# EAGLE board main (EAGLE 9.6.1)
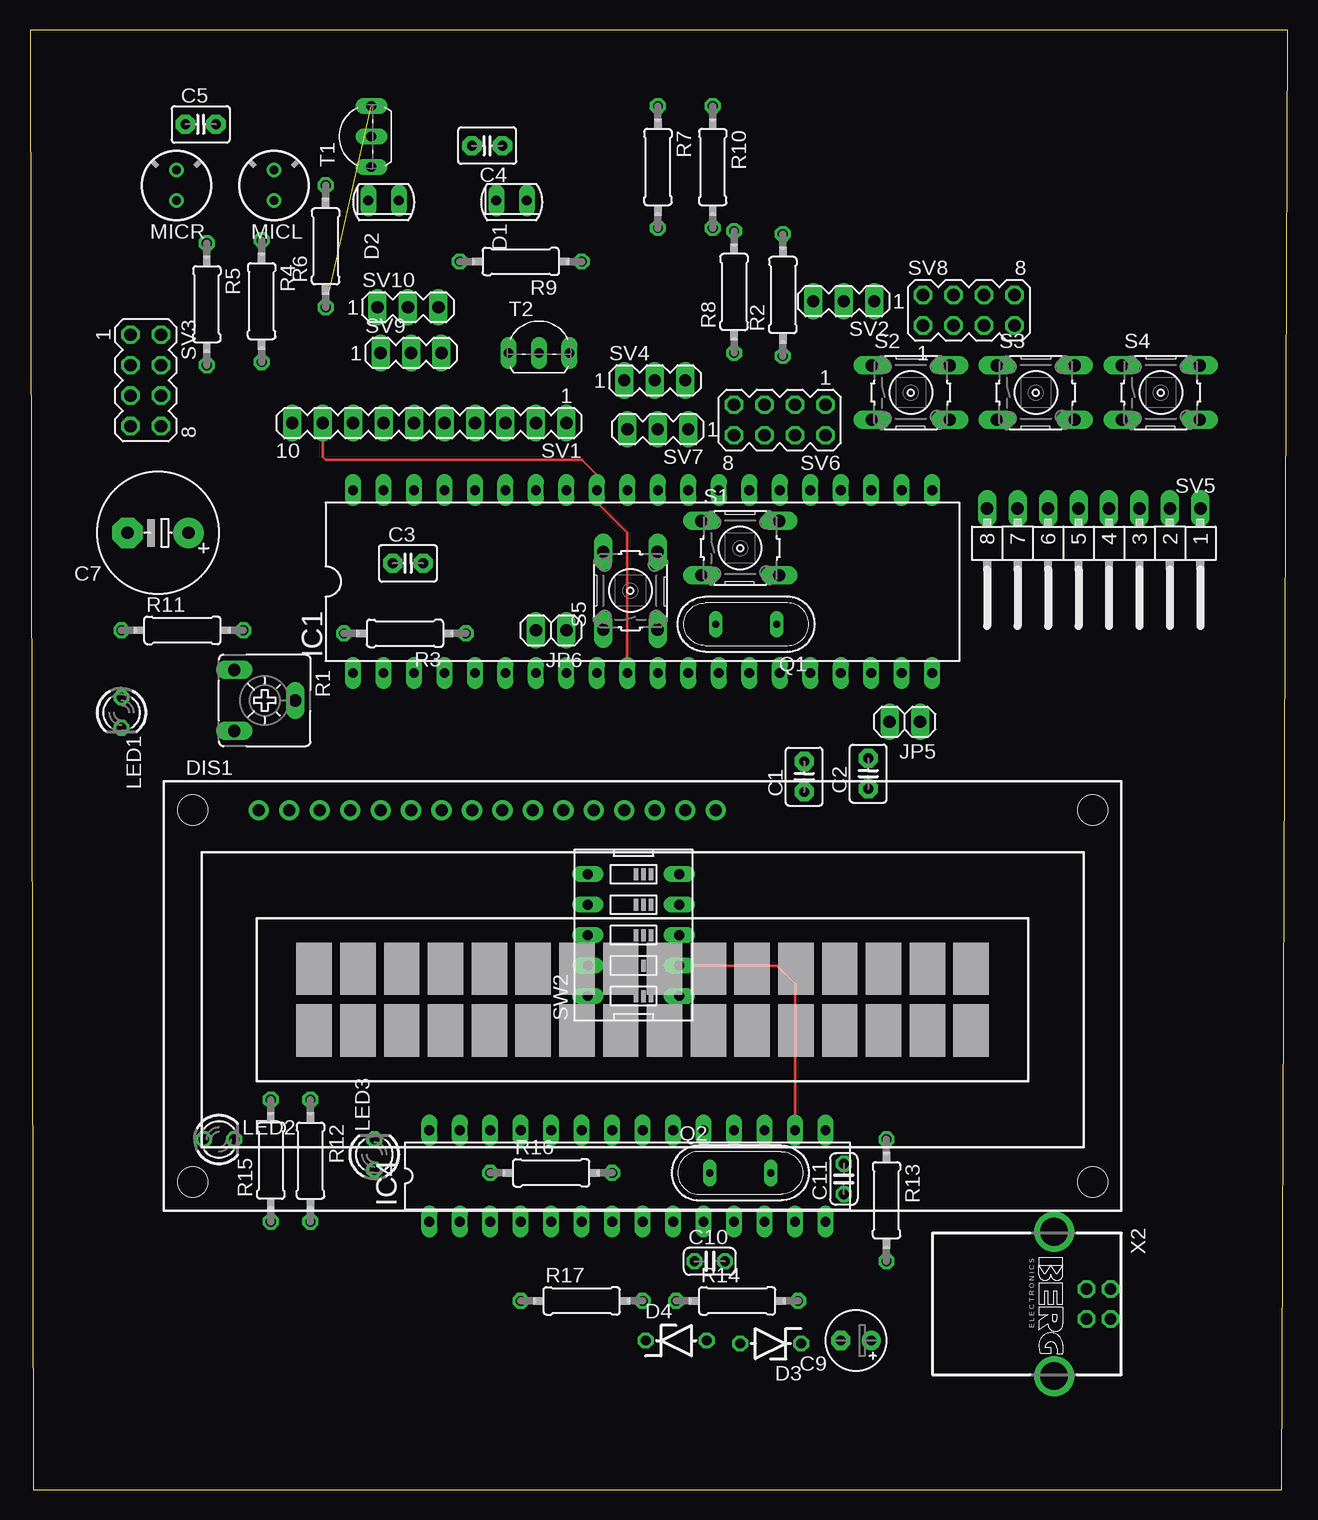
[diagram p0: board, top side]
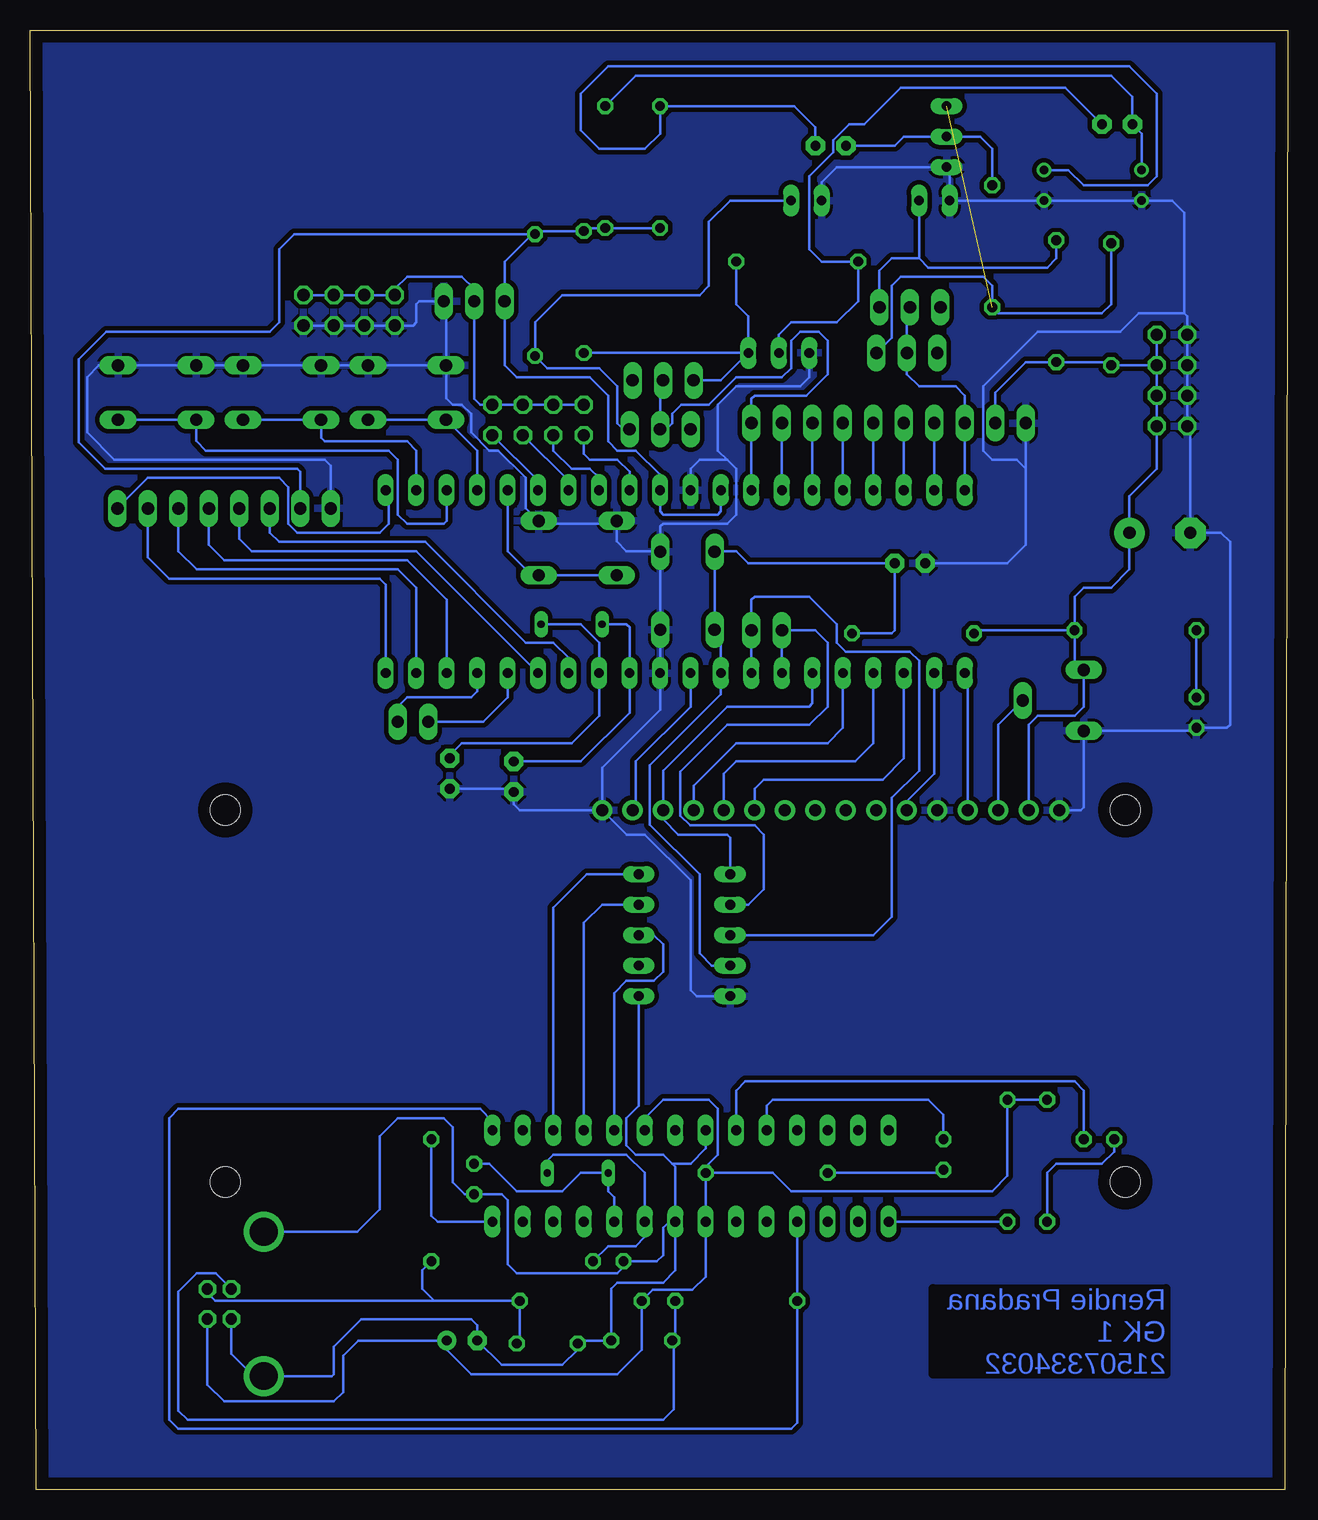
[diagram p1: board, bottom side, seen from below]

Size 104.83 x 121.66 mm. Coordinates in mm from the lower left corner, seen from the top.
Outline: 0.25,0 104.32,0 104.83,121.66 0,121.66 0.25,0
Copper layers (1*16): Top 0.035mm / dielectric 1.5mm / Bottom 0.035mm
Design rules "default *": minimum track width 6mil, minimum drill 0.35mm, track to track 15mil, track to pad 15mil, pad to pad 15mil, via to via 15mil, smd to smd 15mil, copper to edge 40mil, drill to drill 6mil, minimum pad ring 10mil, minimum via ring 8mil, stop-mask expansion 4mil, vias tented up to drill 0mil, thermal gap 10mil

## Footprints (pad centres in the part's own frame; a part is rotated, then mirrored left to right if it is on the bottom)
C2.5-3 = drill 0.813 pad 1.6 octagon: 1 -1.27,0; 2 1.27,0
E5-10,5 = drill 1.016 pad 2.54: + -2.54,0 | drill 1.016 pad 2.54 octagon: - 2.54,0
E2,5-5 = drill 0.813 pad 1.6: + -1.27,0 | drill 0.813 pad 1.6 octagon: - 1.27,0
C025-024X044 = drill 0.813 octagon: 1 -1.27,0; 2 1.27,0
SFH225 = drill 0.813 long: A 0,1.27; K 0,-1.27
ZDIO-5 = drill 0.813 octagon: A 2.54,0; C -2.54,0
TUXGR_16X2_R2 = drill 1 pad 1.676: 1 -32,15.5; 2 -29.46,15.5; 3 -26.92,15.5; 4 -24.38,15.5; 5 -21.84,15.5; 6 -19.3,15.5; 7 -16.76,15.5; 8 -14.22,15.5; 9 -11.68,15.5; 10 -9.14,15.5; 11 -6.6,15.5; 12 -4.06,15.5; 13 -1.52,15.5; 14 1.02,15.5; 15 3.56,15.5; 16 6.1,15.5 | hole 2.5: -37.5,-15.5; 37.5,-15.5; -37.5,15.5; 37.5,15.5
DIL40 = drill 0.813 long: 1 -24.13,-7.62; 2 -21.59,-7.62; 3 -19.05,-7.62; 4 -16.51,-7.62; 5 -13.97,-7.62; 6 -11.43,-7.62; 7 -8.89,-7.62; 8 -6.35,-7.62; 9 -3.81,-7.62; 10 -1.27,-7.62; 11 1.27,-7.62; 12 3.81,-7.62; 13 6.35,-7.62; 14 8.89,-7.62; 15 11.43,-7.62; 16 13.97,-7.62; 17 16.51,-7.62; 18 19.05,-7.62; 19 21.59,-7.62; 20 24.13,-7.62; 21 24.13,7.62; 22 21.59,7.62; 23 19.05,7.62; 24 16.51,7.62; 25 13.97,7.62; 26 11.43,7.62; 27 8.89,7.62; 28 6.35,7.62; 29 3.81,7.62; 30 1.27,7.62; 31 -1.27,7.62; 32 -3.81,7.62; 33 -6.35,7.62; 34 -8.89,7.62; 35 -11.43,7.62; 36 -13.97,7.62; 37 -16.51,7.62; 38 -19.05,7.62; 39 -21.59,7.62; 40 -24.13,7.62
DIL28-3 = drill 0.813 long: 1 -16.51,-3.81; 2 -13.97,-3.81; 3 -11.43,-3.81; 4 -8.89,-3.81; 5 -6.35,-3.81; 6 -3.81,-3.81; 7 -1.27,-3.81; 8 1.27,-3.81; 9 3.81,-3.81; 10 6.35,-3.81; 11 8.89,-3.81; 12 11.43,-3.81; 13 13.97,-3.81; 14 16.51,-3.81; 15 16.51,3.81; 16 13.97,3.81; 17 11.43,3.81; 18 8.89,3.81; 19 6.35,3.81; 20 3.81,3.81; 21 1.27,3.81; 22 -1.27,3.81; 23 -3.81,3.81; 24 -6.35,3.81; 25 -8.89,3.81; 26 -11.43,3.81; 27 -13.97,3.81; 28 -16.51,3.81
1X02 = drill 1.016 long: 1 -1.27,0; 2 1.27,0
LED3MM = drill 0.813 octagon: A -1.27,0; K 1.27,0
F6050AP = drill 0.7 pad 1.2: 1 0,1.27; 2 0,-1.27
QS = drill 0.61 long: 1 -2.54,0; 2 2.54,0
CA6V = drill 1.016 long: A -2.54,-2.54; E 2.54,-2.54; S 0,2.54
0207/10 = drill 0.813 octagon: 1 -5.08,0; 2 5.08,0
B3F-10XX = drill 1.016 long: 1 -3.251,2.261; 2 3.251,2.261; 3 -3.251,-2.261; 4 3.251,-2.261
MA10-1 = drill 1.016 long: 1 -11.43,0; 2 -8.89,0; 3 -6.35,0; 4 -3.81,0; 5 -1.27,0; 6 1.27,0; 7 3.81,0; 8 6.35,0; 9 8.89,0; 10 11.43,0
MA03-1 = drill 1.016 long: 1 -2.54,0; 2 0,0; 3 2.54,0
MA04-2 = drill 1.016 octagon: 1 -3.81,-1.27; 2 -3.81,1.27; 3 -1.27,-1.27; 4 -1.27,1.27; 5 1.27,-1.27; 6 1.27,1.27; 7 3.81,-1.27; 8 3.81,1.27
MA08-1W = drill 1.016 long: 1 -8.89,0; 2 -6.35,0; 3 -3.81,0; 4 -1.27,0; 5 1.27,0; 6 3.81,0; 7 6.35,0; 8 8.89,0
EDG-05 = drill 0.813 long: 1 -5.08,-3.81; 2 -2.54,-3.81; 3 0,-3.81; 4 2.54,-3.81; 5 5.08,-3.81; 6 5.08,3.81; 7 2.54,3.81; 8 0,3.81; 9 -2.54,3.81; 10 -5.08,3.81
TO92-EBC = drill 0.813 long: B 0,-1.27; C 2.54,-1.27; E -2.54,-1.27
PN61729-S = drill 0.95 octagon: 1 1.25,4.71; 2 -1.25,4.71; 3 -1.25,2.71; 4 1.25,2.71 | drill 2.3 pad 2.9: S1 -6.02,0; S2 6.02,0

## Placement (x,y rotation side)
C1  22p  [C2.5-3]  64.52,59.44 90 top
C2  22p  [C2.5-3]  69.85,59.69 90 top
C3  10nF  [C2.5-3]  31.5,77.22 0 top
C4  100nF  [C2.5-3]  38.1,112.01 180 top
C5  100nF  [C2.5-3]  14.22,113.79 0 top
C7  1000uF/16V  [E5-10,5]  10.67,79.76 180 top
C9  10uF/16V  [E2,5-5]  68.83,12.45 180 top
C10  22pF  [C025-024X044]  56.64,19.05 0 top
C11  22pF  [C025-024X044]  67.82,25.91 90 top
D1  SFH225  [SFH225]  40.13,107.44 270 top
D2  SFH225  [SFH225]  29.46,107.44 270 top
D3  DZ3,6V  [ZDIO-5]  61.72,12.19 180 top
D4  DZ3,6V  [ZDIO-5]  53.85,12.45 0 top
DIS1  TUXGR_16X2_R2  [TUXGR_16X2_R2]  51.05,41.15 0 top
IC1  MEGA16-P  [DIL40]  51.05,75.69 0 top
IC4  MEGA8-P  [DIL28-3]  49.78,26.16 0 top
JP5  [1X02]  72.9,64.01 180 top
JP6  [1X02]  43.43,71.63 180 top
LED1  merah  [LED3MM]  7.62,64.77 270 top
LED2  Merah  [LED3MM]  15.75,29.21 0 top
LED3  hijau  [LED3MM]  28.7,27.94 90 top
MICL  MC  [F6050AP]  20.32,108.71 180 top
MICR  MC  [F6050AP]  12.19,108.71 180 top
Q1  8MHz  [QS]  59.69,72.14 180 top
Q2  12MHz  [QS]  59.18,26.42 0 top
R1  20K  [CA6V]  19.56,65.79 270 top
R2  56K  [0207/10]  62.74,99.57 90 top
R3  10K  [0207/10]  31.24,71.37 180 top
R4  56K  [0207/10]  19.3,99.06 270 top
R5  10K  [0207/10]  14.73,98.81 270 top
R6  100K  [0207/10]  24.64,103.63 90 top
R7  10K  [0207/10]  52.32,110.24 270 top
R8  10K  [0207/10]  58.67,99.82 90 top
R9  100K  [0207/10]  40.89,102.36 180 top
R10  10K  [0207/10]  56.9,110.24 270 top
R11  330  [0207/10]  12.7,71.63 0 top
R12  10K  [0207/10]  23.37,27.43 270 top
R13  68  [0207/10]  71.37,24.13 270 top
R14  2K2  [0207/10]  58.93,15.75 0 top
R15  330  [0207/10]  20.07,27.43 90 top
R16  330  [0207/10]  43.43,26.42 0 top
R17  68  [0207/10]  45.97,15.75 0 top
S1  [B3F-10XX]  59.18,78.49 0 top
S2  [B3F-10XX]  73.41,91.44 0 top
S3  [B3F-10XX]  83.82,91.44 0 top
S4  [B3F-10XX]  94.23,91.44 0 top
S5  [B3F-10XX]  50.04,74.93 90 top
SV1  [MA10-1]  33.27,88.9 180 top
SV2  [MA03-1]  67.82,99.06 180 top
SV3  [MA04-2]  9.65,92.46 270 top
SV4  [MA03-1]  52.07,92.46 0 top
SV5  [MA08-1W]  88.65,81.79 180 top
SV6  [MA04-2]  62.48,89.15 180 top
SV7  [MA03-1]  52.32,88.39 180 top
SV8  [MA04-2]  78.23,98.3 0 top
SV9  [MA03-1]  31.75,94.74 0 top
SV10  [MA03-1]  31.5,98.55 0 top
SW2  [EDG-05]  50.29,46.23 90 top
T1  [TO92-EBC]  27.18,112.78 90 top
T2  [TO92-EBC]  42.42,96.01 0 top
X2  PN61729-S  [PN61729-S]  85.34,15.49 270 top

## Library data of the parts
C1-C5 = capacitor-wima
C7 C9-C11 R2-R11 = rcl
D1 D2 = opto-trans-siemens; OC_FARNELL: unknown; OC_NEWARK: unknown
D3 D4 = diode
DIS1 = display-lcd; OC_FARNELL: unknown; OC_NEWARK: unknown
IC1 = atmel; MPN: ATMEGA16-16PU; OC_FARNELL: 9171142; OC_NEWARK: 01M6885
IC4 = atmel
JP5 JP6 = pinhead
LED1-LED3 = led
MICL MICR = microphon
Q1 Q2 SW2 = special
R1 = pot
R12-R17 = resistor
S1-S5 = switch-omron; MPN: B3F-1000; OC_FARNELL: 176432; OC_NEWARK: 36M3542
SV1-SV10 = con-lstb; OC_FARNELL: unknown; OC_NEWARK: unknown
T1 T2 = transistor
X2 = con-berg

## Nets
DGND: C9.- C10.1 C11.1 D3.A D4.A IC4.8 IC4.22 SW2.1 X2.4 X2.S1 X2.S2
GND: C1.1 C2.1 C3.1 C7.- D1.K D2.K DIS1.1 DIS1.5 DIS1.16 IC1.11 IC1.31 LED1.K MICL.1 MICR.1 R1.E S1.1 S1.2 S2.1 S2.2 S3.1 S3.2 S4.1 S4.2 S5.3 S5.4 SV1.10 SV2.1 SV3.1 SV3.3 SV3.5 SV3.7 SV5.8 SV8.1 SV8.3 SV8.5 SV8.7 SW2.10 T1.E T2.E
MISO: IC1.7 JP6.2 SW2.7
MOSI: DIS1.14 IC1.6 SW2.6
N$1: IC1.33 SV1.1 SV4.2 SV7.2
N$2: IC1.34 SV1.2
N$3: IC1.35 SV1.3
N$4: IC1.36 SV1.4
N$5: IC1.37 SV1.5
N$6: IC1.38 SV1.6
N$7: IC1.39 SV1.7
N$8: D2.A R4.1 SV10.3
N$9: IC1.24 S2.3 S2.4
N$10: DIS1.13 IC1.5
N$11: DIS1.12 IC1.4
N$12: DIS1.11 IC1.3
N$13: DIS1.6 IC1.2
N$14: R5.1 R6.1 SV9.3 T1.C
N$15: DIS1.3 R1.S
N$16: C1.2 IC1.12 Q1.2
N$17: C2.2 IC1.13 Q1.1
N$18: DIS1.4 IC1.1
N$19: D1.A R2.1 SV7.1
N$20: IC1.23 S4.3 S4.4
N$21: IC1.40 SV1.8 SV9.2 SV10.2
N$22: C4.2 R6.2 T1.B
N$23: C4.1 MICL.2 R7.1
N$24: R8.1 R9.1 SV4.1 T2.C
N$25: C5.2 R9.2 T2.B
N$26: C5.1 MICR.2 R10.1
N$27: IC1.22 S3.3 S3.4
N$28: IC1.25 S1.3 S1.4
N$30: IC1.21 SV5.1
N$32: IC1.20 SV5.2
N$33: IC1.19 SV5.3
N$34: IC1.18 SV5.4
N$35: IC1.15 SV5.5
N$36: IC1.14 SV5.6
N$37: IC1.16 JP5.2
N$38: IC1.17 JP5.1
N$41: LED1.A R11.1
N$42: IC4.1 R12.2
N$44: IC1.26 SV6.2
N$45: IC1.27 SV6.4
N$46: IC1.28 SV6.6
N$47: IC1.29 SV6.8
N$51: C10.2 IC4.9 Q2.2
N$52: C11.2 IC4.10 Q2.1
N$53: IC4.14 R13.1
N$55: LED2.A R15.1
N$56: LED3.A R16.1
N$57: IC4.23 LED2.K
N$58: IC4.24 LED3.K
N$59: D4.C R17.2 X2.3
N$67: IC4.4 IC4.15 R17.1
N$69: D3.C R13.2 R14.2 X2.2
N$175: IC4.17 SW2.5
N$176: IC4.18 SW2.4
N$177: IC4.19 SW2.3
N$178: IC4.16 SW2.2
RESET: C3.2 IC1.9 R3.1 S5.1 S5.2 SW2.9
SCK: IC1.8 JP6.1 SW2.8
VCC: C7.+ DIS1.2 DIS1.15 IC1.10 IC1.30 IC1.32 R1.A R2.2 R3.2 R4.2 R5.2 R7.2 R8.2 R10.2 R11.2 SV1.9 SV2.3 SV3.2 SV3.4 SV3.6 SV3.8 SV5.7
VDD: SV2.2 SV6.1 SV6.3 SV6.5 SV6.7 SV8.2 SV8.4 SV8.6 SV8.8
VPP: C9.+ IC4.7 IC4.20 R12.1 R14.1 R15.2 R16.2 X2.1

## Tracks (layer width: path | path; a pad name or v marks a point on that pad's centre or on a via)
DGND
  Bottom 0.203: IC4.8 51.05,18.29 52.07,17.27 55.88,17.27 56.39,16.76 D4.A 58.93,12.45 D3.A 59.18,11.68 60.45,10.41 65.53,10.41 C9.- 67.56,13.72 68.07,14.22 77.22,14.22 79.5,11.94 79.5,9.65 79.68,9.47 X2.S2 86.18,9.47 88.05,11.35 X2.4 | SW2.1 54.1,32 55.12,30.99 55.12,28.7 54.36,27.94 52.07,27.94 51.31,27.18 | IC4.22 48.51,28.45 49.78,27.18 51.31,27.18 | 51.31,27.18 51.05,26.92 IC4.8 | IC4.8 51.56,22.35 52.07,21.84 52.07,19.56 52.58,19.05 C10.1 55.37,18.54 55.88,18.03 64.26,18.03 65.02,18.8 65.02,24.13 65.53,24.64 C11.1 68.58,24.64 69.6,25.65 69.6,30.23 70.36,30.99 74.17,30.99 75.69,29.46 75.69,23.37 77.55,21.51 X2.S1
GND
  Bottom 0.203: DIS1.16 64.01,56.65 64.52,57.15 C1.1 64.77,58.42 C2.1 | DIS1.16 57.15,60.19 52.32,65.02 IC1.11 52.32,71.65 S5.3 S5.4 | S5.4 52.3,80.29 52.07,80.52 46.74,80.52 45.97,81.28 45.97,85.09 46.74,85.85 | 46.74,85.85 49.02,85.85 49.78,85.09 IC1.31 | 46.74,85.85 47.5,86.61 47.5,90.42 45.97,91.95 40.64,91.95 39.88,92.71 T2.E | C3.1 23.37,77.22 21.84,78.74 21.84,85.09 | 21.84,85.09 SV1.10 | 21.84,85.09 22.61,85.85 24.64,85.85 25.4,86.61 25.4,91.95 20.83,96.52 13.97,96.52 12.45,98.04 8.64,98.04 | 8.64,98.04 8.38,97.79 SV3.1 SV3.3 SV3.5 SV3.7 8.13,88.39 C7.- 5.59,79.76 4.83,78.99 4.83,63.75 5.08,63.5 LED1.K 7.87,63.25 R1.E 17.02,56.9 17.27,56.65 DIS1.1 | 8.64,98.04 8.64,106.43 9.65,107.44 MICR.1 MICL.1 D2.K 28.19,109.98 T1.E 37.59,110.24 38.86,108.97 D1.K | S5.4 52.35,78.23 55.12,78.23 55.93,79.05 55.93,80.52 | 55.93,80.52 S1.1 | 55.93,80.52 62.2,80.52 S1.2 63.5,81.81 63.5,84.33 65.79,86.61 66.55,86.61 68.07,88.14 68.07,89.66 68.83,90.42 69.6,90.42 70.16,90.98 S2.1 | S2.1 S2.2 S3.1 S3.2 S4.1 S4.2 99.09,93.7 100.08,92.71 100.08,88.14 97.79,85.85 80.26,85.85 79.76,85.34 SV5.8 | S2.1 70.16,98.86 SV2.1 72.39,99.06 72.64,98.81 72.64,97.28 72.9,97.03 SV8.1 SV8.3 SV8.5 SV8.7 | DIS1.16 55.12,54.61 53.59,54.61 49.78,50.8 49.78,41.66 49.28,41.15 SW2.10
  pour Bottom: 104.65,-0.25 104.65,121.67 0.25,121.67 0.25,-0.25
MISO
  Bottom 0.203: IC1.7 JP6.2 39.37,71.63 38.35,70.61 38.35,65.28 39.88,63.75 46.74,63.75 50.63,59.86 50.63,56.2 49.8,55.37 44.45,55.37 43.69,54.61 43.69,50.04 44.96,48.77 SW2.7
MOSI
  Bottom 0.203: IC1.6 39.62,65.53 39.88,65.28 46.74,65.28 52.07,59.94 DIS1.14 52.07,55.89 50.8,54.61 46.74,54.61 46.48,54.36 SW2.6
N$1
  Bottom 0.2: SV1.1 IC1.33
  Bottom 0.203: SV4.2 52.32,92.2 SV7.2 51.82,88.39 51.31,88.9 51.31,89.66 50.55,90.42 48.26,90.42 45.97,92.71 42.16,92.71 41.4,93.47 41.4,95.76 40.64,96.52 39.12,96.52 38.35,95.76 38.35,92.96 40.13,91.19 44.45,91.19 44.7,90.93 SV1.1
N$2
  Bottom 0.2: SV1.2 IC1.34
N$3
  Bottom 0.2: SV1.3 IC1.35
N$4
  Bottom 0.2: SV1.4 IC1.36
N$5
  Bottom 0.2: SV1.5 IC1.37
N$6
  Bottom 0.2: SV1.6 IC1.38
N$7
  Bottom 0.2: SV1.7 IC1.39
N$8
  Bottom 0.203: D2.A 30.73,102.62 | 30.73,102.62 29.97,101.85 20.07,101.85 19.3,102.62 R4.1 | 30.73,102.62 33.02,102.62 34.04,101.6 SV10.3
N$9
  Bottom 0.203: IC1.24 67.56,86.59 S2.3 S2.4
N$10
  Bottom 0.203: IC1.5 37.08,63.5 38.35,62.23 45.97,62.23 49.53,58.67 DIS1.13
N$11
  Bottom 0.203: IC1.4 34.54,62.23 36.07,60.71 45.97,60.71 46.99,59.69 DIS1.12
N$12
  Bottom 0.203: DIS1.11 44.45,58.42 43.69,59.18 33.78,59.18 32,60.96 IC1.3
N$13
  Bottom 0.203: IC1.2 29.46,59.69 31.75,57.4 DIS1.6
N$14  (1 unrouted)
  Bottom 0.203: R5.1 14.73,98.81 15.49,98.04 24.13,98.04 R6.1 24.64,100.33 25.4,101.09 32.26,101.09 33.02,100.33 33.02,96.01 SV9.3
N$15
  Bottom 0.203: R1.S 24.13,63.75 DIS1.3
N$16
  Bottom 0.203: C1.2 58.93,60.71 54.86,64.77 IC1.12 54.86,71.88 55.12,72.14 Q1.2
N$17
  Bottom 0.203: Q1.1 58.93,72.14 57.4,70.61 IC1.13 57.4,64.52 59.69,62.23 68.83,62.23 69.85,61.21 C2.2
N$18
  Bottom 0.203: DIS1.4 26.67,67.82 IC1.1
N$19
  Bottom 0.203: D1.A 46.48,107.44 48.26,105.66 48.26,100.33 49.02,99.57 60.45,99.57 62.74,97.28 R2.1 61.72,93.47 57.4,93.47 55.88,91.95 55.88,88.9 55.37,88.39 SV7.1
N$20
  Bottom 0.203: S4.4 S4.3 90.98,87.43 90.17,86.61 74.93,86.61 74.17,85.85 74.17,81.28 73.41,80.52 70.36,80.52 70.1,80.77 IC1.23
N$21
  Bottom 0.2: SV1.8 IC1.40
  Bottom 0.203: SV10.2 31.75,98.3 SV9.2 31.75,92.96 30.73,91.95 27.69,91.95 26.92,91.19 SV1.8
N$22
  Bottom 0.203: C4.2 32.77,112.01 32,112.78 T1.B 25.65,112.78 24.64,111.76 R6.2
N$23
  Bottom 0.203: MICL.2 18.29,109.98 17.02,108.71 11.68,108.71 10.92,109.47 10.92,116.33 13.21,118.62 56.64,118.62 58.93,116.33 58.93,113.28 57.4,111.76 53.59,111.76 52.32,113.03 R7.1 41.15,115.32 39.37,113.54 C4.1
N$24
  Bottom 0.203: R9.1 45.97,98.81 44.96,97.79 T2.C | T2.C 47.24,92.46 SV4.1 | T2.C R8.1
N$25
  Bottom 0.203: T2.B 42.42,96.27 41.4,97.28 37.59,97.28 35.81,99.06 R9.2 38.86,102.36 39.88,103.38 39.88,109.47 37.88,111.47 37.88,112.45 36.54,113.79 35.31,113.79 32.26,116.84 18.54,116.84 C5.2
N$26
  Bottom 0.203: MICR.2 12.19,113.03 C5.1 12.95,116.08 14.73,117.86 54.36,117.86 R10.1
N$27
  Bottom 0.203: IC1.22 72.64,86.61 73.41,87.38 80.26,87.38 80.57,87.68 S3.3 S3.4
N$28
  Bottom 0.203: S1.3 S1.4 63.02,76.22 65.02,78.23 IC1.25
N$30
  Bottom 0.203: SV5.1 95,84.33 84.07,84.33 83.31,83.57 83.31,80.52 82.55,79.76 75.69,79.76 74.93,80.52 74.93,83.06 IC1.21
N$32
  Bottom 0.203: IC1.20 75.18,75.44 75.69,75.95 93.22,75.95 95,77.72 SV5.2
N$33
  Bottom 0.203: IC1.19 72.64,75.18 74.17,76.71 90.93,76.71 92.46,78.23 SV5.3
N$34
  Bottom 0.203: IC1.18 70.1,74.17 73.41,77.47 88.65,77.47 89.92,78.74 SV5.4
N$35
  Bottom 0.203: IC1.15 72.64,78.23 86.36,78.23 87.38,79.25 SV5.5
N$36
  Bottom 0.203: IC1.14 59.94,69.34 61.21,70.61 63.5,70.61 71.88,78.99 84.07,78.99 84.84,79.76 SV5.6
N$37
  Bottom 0.203: IC1.16 65.02,66.04 67.06,64.01 JP5.2
N$38
  Bottom 0.203: IC1.17 67.56,66.55 68.07,66.04 73.41,66.04 74.17,65.28 JP5.1
N$41
  Bottom 0.203: R11.1 LED1.A
N$42
  Bottom 0.203: R12.2 IC4.1
N$44
  Bottom 0.203: IC1.26 62.48,84.07 SV6.2
N$45
  Bottom 0.203: SV6.4 59.94,84.07 IC1.27
N$46
  Bottom 0.203: SV6.6 61.21,86.61 59.69,85.09 58.17,85.09 57.4,84.33 IC1.28
N$47
  Bottom 0.203: SV6.8 58.67,86.36 58.17,85.85 55.88,85.85 54.86,84.84 IC1.29
N$51
  Bottom 0.203: Q2.2 61.72,27.43 61.21,27.94 55.12,27.94 53.59,26.42 IC4.9 53.59,21.08 54.36,20.32 56.64,20.32 C10.2
N$52
  Bottom 0.203: IC4.10 56.13,24.38 56.64,24.89 Q2.1 58.93,26.42 60.45,24.89 64.26,24.89 66.55,27.18 C11.2
N$53
  Bottom 0.203: R13.1 71.37,22.86 70.87,22.35 IC4.14
N$55
  Bottom 0.203: LED2.A 14.48,28.19 15.49,27.18 19.3,27.18 20.07,26.42 R15.1
N$56
  Bottom 0.203: R16.1 28.96,26.42 LED3.A
N$57
  Bottom 0.203: LED2.K 17.02,33.27 17.78,34.04 45.21,34.04 45.97,33.27 IC4.23
N$58
  Bottom 0.203: LED3.K 28.7,31.24 29.97,32.51 42.93,32.51 43.43,32 IC4.24
N$59
  Bottom 0.203: R17.2 51.05,12.7 51.18,12.57 | 51.18,12.57 D4.C | X2.3 89.34,18.03 90.93,18.03 92.46,16.51 92.46,6.6 91.69,5.84 52.07,5.84 51.18,6.73 51.18,12.57
N$67
  Bottom 0.203: IC4.4 R17.1 40.89,5.59 41.4,5.08 92.46,5.08 93.22,5.84 93.22,30.99 92.46,31.75 67.31,31.75 66.29,30.73 IC4.15
N$69
  Bottom 0.203: 71.12,15.75 R14.2 64.01,12.45 D3.C | R13.2 72.14,18.29 72.14,16.76 71.12,15.75 | 71.12,15.75 89.41,15.75 90.05,16.39 X2.2
N$175
  Bottom 0.203: SW2.5 58.42,51.31 61.21,48.51 IC4.17
N$176
  Bottom 0.203: IC4.18 58.67,47.24 57.15,48.77 SW2.4
N$177
  Bottom 0.203: SW2.3 52.83,46.23 52.07,45.47 52.07,43.18 52.83,42.42 55.12,42.42 56.13,41.4 IC4.19
N$178
  Top 0.203: SW2.2 62.23,43.69 63.75,42.16 IC4.16
RESET
  Bottom 0.203: R3.1 33.02,71.37 32.77,71.63 C3.2 44.96,77.22 45.97,78.23 47.73,78.23 S5.2 S5.1 47.24,71.15 IC1.9 47.24,66.29 53.17,60.37 53.17,55.43 49.02,51.29 49.02,44.7 48.01,43.69 SW2.9
SCK
  Bottom 0.203: IC1.8 JP6.1 44.7,74.17 44.45,74.42 39.88,74.42 37.59,72.14 37.59,70.61 36.83,69.85 31.5,69.85 30.73,69.09 30.73,59.94 33.02,57.66 33.02,47.75 34.54,46.23 SW2.8
VCC
  Top 0.203: SV1.9 24.38,86.11 24.64,85.85 45.97,85.85 47.24,84.58 47.24,83.57 IC1.32 47.24,82.3 49.78,79.76 IC1.10
  Bottom 0.203: DIS1.15 54.36,56.91 54.36,60.71 49.78,65.28 IC1.10 | IC1.32 47.24,81.53 47.5,81.28 52.07,81.28 52.32,81.53 IC1.30 52.32,84.58 54.36,86.61 55.88,86.61 56.64,87.38 56.64,91.19 58.17,92.71 64.26,92.71 65.28,93.73 SV2.3 65.28,102.36 62.99,104.65 R2.2 | SV3.2 SV3.4 | SV3.4 SV3.6 SV3.8 10.92,85.09 13.21,82.8 C7.+ 13.21,76.71 14.73,75.18 17.02,75.18 17.78,74.42 R11.2 | R11.2 17.78,69.09 R1.A 17.02,65.28 17.78,64.52 20.83,64.52 21.59,63.75 DIS1.2 | SV3.4 R5.2 14.99,93.98 R4.2 21.84,93.98 24.38,91.44 SV1.9 | R11.2 25.91,71.63 R3.2 | R7.2 R10.2 58.42,105.16 R8.2 62.48,104.9 R2.2 | R2.2 82.8,104.65 84.07,103.38 84.07,97.28 84.84,96.52 98.47,96.52 100.76,94.23 100.76,87.29 98.55,85.09 82.55,85.09 82.3,84.84 SV5.7
VDD
  Bottom 0.203: SV8.8 SV8.6 SV8.4 SV8.2 74.42,100.08 73.41,101.09 68.83,101.09 67.82,100.08 SV2.2 67.82,90.93 67.31,90.42 SV6.1 SV6.3 SV6.5 SV6.7
VPP
  Bottom 0.203: R16.2 IC4.7 48.51,17.78 49.63,16.66 52.93,16.66 R14.1 53.85,11.68 55.88,9.65 68.07,9.65 70.1,11.68 C9.+ 77.47,12.45 78.74,11.18 78.74,8.13 79.5,7.37 88.65,7.37 90.05,8.77 X2.1 | R15.2 R12.1 23.37,26.16 24.64,24.89 41.4,24.89 42.93,26.42 R16.2 | R16.2 48.51,26.92 47.5,27.94 47.5,31.75 48.26,32.51 52.07,32.51 53.59,30.99 IC4.20

## Text on the board
Bottom: Rendie Pradana / GK 1 / 21507334032